# EAGLE board circuitdraft (EAGLE 9.5.2)
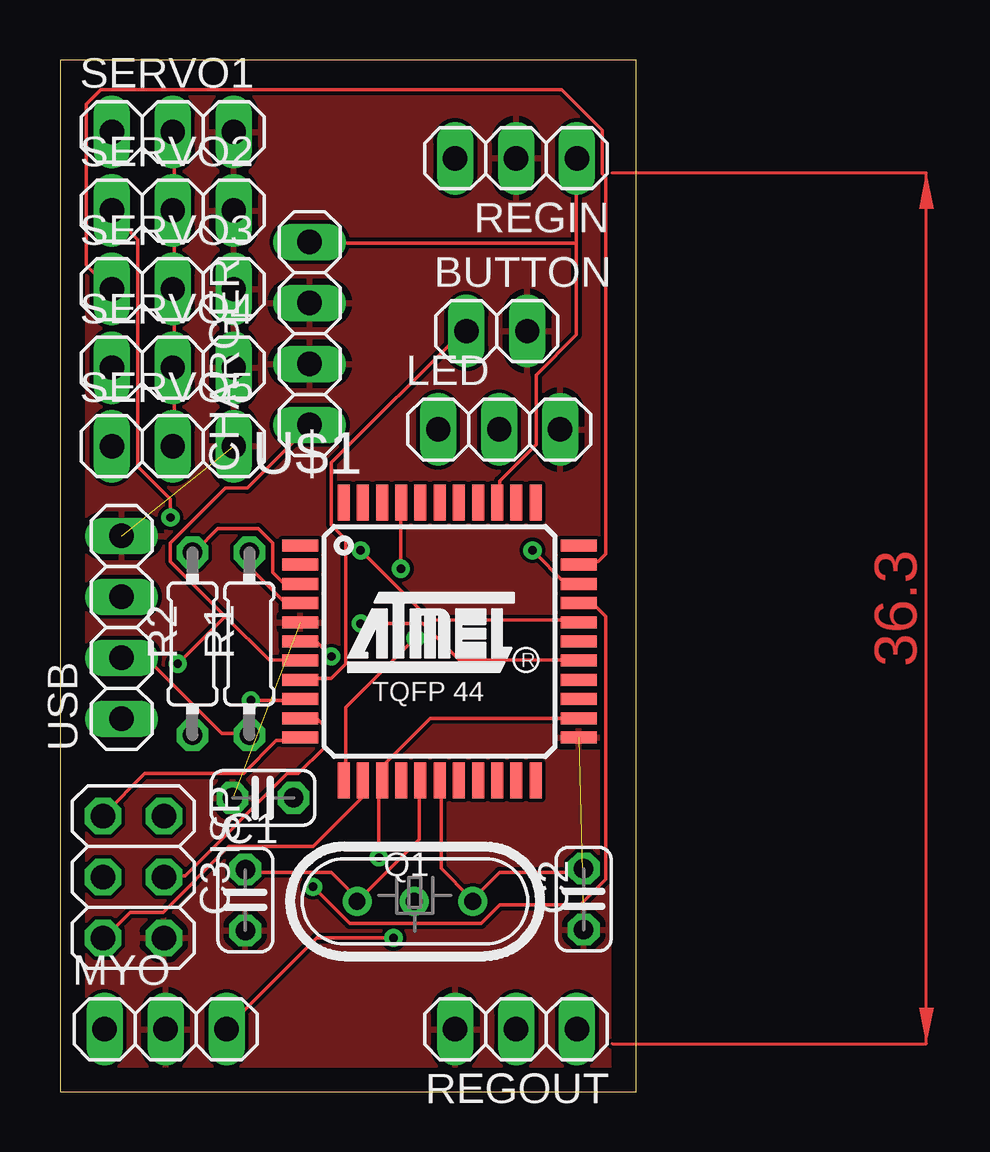
[diagram p0: board, top side]
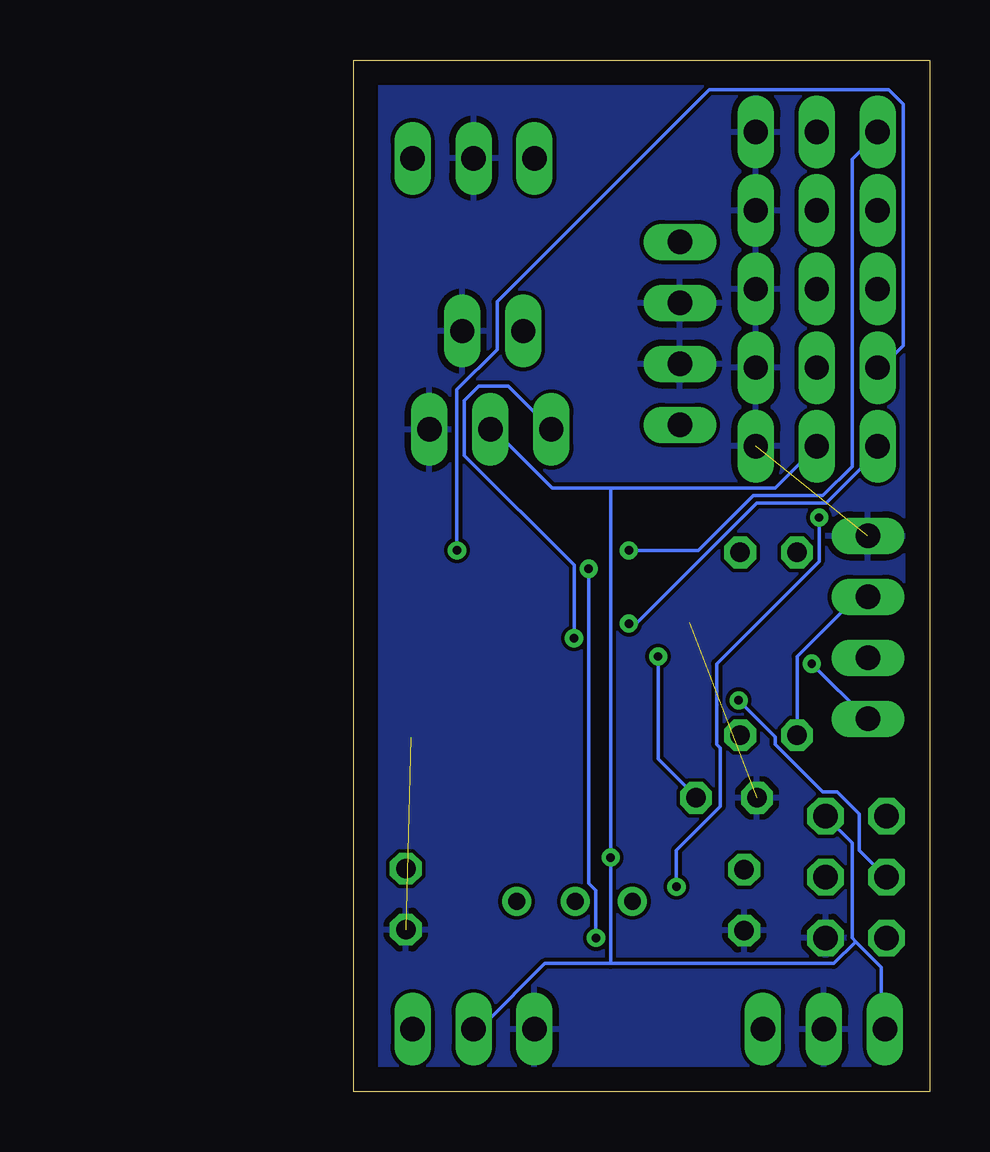
[diagram p1: board, bottom side, seen from below]

Size 24 x 43 mm. Coordinates in mm from the lower left corner, seen from the top.
Outline: 0,0 24,0 24,43 0,43 0,0
Copper layers (1*16): Top 0.035mm / dielectric 1.5mm / Bottom 0.035mm
Design rules "default": minimum track width 6mil, minimum drill 0.35mm, track to track 6mil, track to pad 6mil, pad to pad 6mil, via to via 6mil, smd to smd 6mil, copper to edge 40mil, drill to drill 6mil, minimum pad ring 10mil, minimum via ring 8mil, stop-mask expansion 4mil, vias tented up to drill 0mil, thermal gap 10mil

## Footprints (pad centres in the part's own frame; a part is rotated, then mirrored left to right if it is on the bottom)
1X02 = drill 1.016 long: 1 -1.27,0; 2 1.27,0
C025-024X044 = drill 0.813 octagon: 1 -1.27,0; 2 1.27,0
1X04 = drill 1.016 long: 1 -3.81,0; 2 -1.27,0; 3 1.27,0; 4 3.81,0
2X03 = drill 1.016 octagon: 1 -2.54,-1.27; 2 -2.54,1.27; 3 0,-1.27; 4 0,1.27; 5 2.54,-1.27; 6 2.54,1.27
1X03 = drill 1.016 long: 1 -2.54,0; 2 0,0; 3 2.54,0
HC49U = drill 0.7 pad 1.2: 1 -2.413,0; 2 -0.027,0; 3 2.413,0
0204/7 = drill 0.813 octagon: 1 -3.81,0; 2 3.81,0
TQFP44 = smd 1.5 x 0.5: 1 -5.8,4; 2 -5.8,3.2; 3 -5.8,2.4; 4 -5.8,1.6; 5 -5.8,0.8; 6 -5.8,0; 7 -5.8,-0.8; 8 -5.8,-1.6; 9 -5.8,-2.4; 10 -5.8,-3.2; 11 -5.8,-4; 23 5.8,-4; 24 5.8,-3.2; 25 5.8,-2.4; 26 5.8,-1.6; 27 5.8,-0.8; 28 5.8,0; 29 5.8,0.8; 30 5.8,1.6; 31 5.8,2.4; 32 5.8,3.2; 33 5.8,4 | smd 0.5 x 1.5: 12 -4,-5.8; 13 -3.2,-5.8; 14 -2.4,-5.8; 15 -1.6,-5.8; 16 -0.8,-5.8; 17 0,-5.8; 18 0.8,-5.8; 19 1.6,-5.8; 20 2.4,-5.8; 21 3.2,-5.8; 22 4,-5.8; 34 4,5.8; 35 3.2,5.8; 36 2.4,5.8; 37 1.6,5.8; 38 0.8,5.8; 39 0,5.8; 40 -0.8,5.8; 41 -1.6,5.8; 42 -2.4,5.8; 43 -3.2,5.8; 44 -4,5.8

## Placement (x,y rotation side)
BUTTON  [1X02]  18.2,31.7 0 top
C1  1 uF  [C025-024X044]  8.46,12.24 180 top
C2  22pF  [C025-024X044]  21.82,8.02 90 top
C3  22 pF  [C025-024X044]  7.72,7.98 90 top
CHARGER  [1X04]  10.4,31.6 90 top
ISP  [2X03]  3.06,8.94 270 top
LED  [1X03]  18.3,27.6 0 top
MYO  [1X03]  4.4,2.6 0 top
Q1  16 MHz  [HC49U]  14.79,7.93 0 top
R1  22 Ohms  [0204/7]  7.89,18.66 90 top
R2  22 Ohms  [0204/7]  5.52,18.66 90 top
REGIN  [1X03]  19,38.9 180 top
REGOUT  [1X03]  19,2.6 180 top
SERVO1  [1X03]  4.7,40 0 top
SERVO2  [1X03]  4.7,36.73 0 top
SERVO3  [1X03]  4.7,33.45 0 top
SERVO4  [1X03]  4.7,30.18 0 top
SERVO5  [1X03]  4.7,26.9 0 top
U$1  ATMEGA32U4-AU  [TQFP44]  15.82,18.76 0 top
USB  [1X04]  2.57,19.35 90 top

## Library data of the parts
BUTTON CHARGER ISP LED MYO REGIN REGOUT SERVO1-SERVO5 USB = pinhead
C1-C3 = rcl; SPICEPREFIX: C
Q1 = crystal; OC_FARNELL: unknown; OC_NEWARK: unknown
R1 R2 = rcl; SPICEPREFIX: R
U$1 = mega32U4

## Nets
D+: R1.1 USB.2
D-: R2.1 USB.3
DATAIN: LED.1 U$1.12
GND: BUTTON.2 C1.2 C2.1 C3.1 CHARGER.2 CHARGER.3 ISP.6 LED.3 MYO.2 REGIN.2 REGOUT.3 SERVO1.3 SERVO2.3 SERVO3.3 SERVO4.3 SERVO5.3 U$1.5 U$1.23 USB.4
INT: U$1.25
INTERRUPT: BUTTON.1 U$1.8
MISO: ISP.1 U$1.11
MOSI: ISP.4 U$1.10
N$1: MYO.3 U$1.41
N$2: R2.2 U$1.3
N$3: C1.1 U$1.6
N$4: R1.2 U$1.4
N$5: C3.2 Q1.1 U$1.16
N$6: C2.2 Q1.3 U$1.17
POWER: ISP.2 LED.2 MYO.1 REGOUT.2 SERVO1.2 SERVO2.2 SERVO3.2 SERVO4.2 SERVO5.2 U$1.14 U$1.24
RST: ISP.5 U$1.13
SCK: ISP.3 U$1.9
SCL: U$1.18
SDA: U$1.19
SIGNAL1: SERVO1.1 U$1.29
SIGNAL2: SERVO2.1 U$1.30
SIGNAL3: SERVO3.1 U$1.32
SIGNAL4: SERVO4.1 U$1.31
SIGNAL5: SERVO5.1 U$1.27
STAT: U$1.26
VBAT: CHARGER.4 REGIN.1 U$1.36
VBUS: CHARGER.1 U$1.7 USB.1

## Tracks (layer width: path | path; a pad name or v marks a point on that pad's centre or on a via)
D+
  Top 0.152: R1.1 7.8,14.94 6.73,14.94 3.69,17.98 2.62,17.98 USB.2
D-
  Bottom 0.152: R2.1 5.52,14.94 5.52,18.14 3.08,20.57 2.62,20.57 USB.3
DATAIN  (via drill 0.35)
  Top 0.152: v14.81,18.9 11.92,16 11.92,13.11 U$1.12
  Bottom 0.152: v14.81,18.9 14.81,21.95 19.38,26.52 19.38,28.8 18.77,29.41 17.55,29.41 15.88,27.74 LED.1
GND  (3 unrouted)
  pour Top: -6.8,44.4 26.6,44.4 26.6,-1.6 -6.8,-1.6
  pour Bottom: -7.7,44.2 26.6,44.2 26.6,-1.6 -7.7,-1.6
INTERRUPT
  Top 0.152: U$1.8 10.09,17.22 11.31,17.22 11.92,17.83 11.92,23.01 11.31,23.62 11.31,26.21 16.79,31.7 BUTTON.1
MISO
  Top 0.152: U$1.11 9.94,14.63 9.02,14.63 7.65,13.26 3.53,13.26 1.86,11.58 ISP.1
MOSI
  Top 0.152: U$1.10 10.09,15.54 10.7,15.54 11,15.24 11,14.33 9.94,13.26 9.48,13.26 5.21,8.99 4.45,8.99 ISP.4
N$1  (via drill 0.35)
  Top 0.152: v14.2,21.79 14.2,24.54 U$1.41 | v13.9,6.4 10.7,6.4 7.04,2.74 MYO.3
  Bottom 0.152: v14.2,21.79 14.2,8.69 13.9,8.38 v13.9,6.4
N$2
  Top 0.152: U$1.3 9.94,21.18 9.33,21.18 8.87,21.64 8.87,22.86 8.26,23.47 6.58,23.47 5.67,22.55 R2.2
N$3  (via drill 0.35)
  Top 0.152: v11.31,18.14 10.7,18.75 10.09,18.75 U$1.6
  Bottom 0.152: v11.31,18.14 11.31,13.87 9.78,12.34 C1.1
N$4
  Top 0.152: U$1.4 9.94,20.42 9.33,20.42 7.95,21.79 7.95,22.4 R1.2
N$5
  Top 0.152: U$1.16 14.96,12.95 14.96,10.52 12.53,8.08 Q1.1 12.37,8.08 11.31,9.14 7.8,9.14 C3.2
N$6
  Top 0.152: U$1.17 15.88,12.95 15.88,9.3 17.1,8.08 Q1.3 17.25,8.08 18.32,9.14 21.67,9.14 C2.2
POWER  (via drill 0.35)
  Top 0.152: SERVO1.2 4.75,39.93 4.75,36.73 SERVO2.2 4.75,36.58 4.75,33.53 SERVO3.2 4.75,33.38 4.75,30.18 SERVO4.2 4.75,30.02 4.75,26.98 SERVO5.2 | U$1.24 21.52,15.54 15.42,15.54 13.44,13.56 13.44,13.11 U$1.14 13.29,12.95 v13.29,9.75
  Bottom 0.152: 13.29,25.15 6.43,25.15 4.75,26.82 SERVO5.2 | 13.29,25.15 15.73,25.15 18.16,27.58 LED.2 | 3.08,6.25 3.23,6.4 3.23,10.36 4.3,11.43 ISP.2 | 3.08,6.25 2.01,5.18 2.01,2.74 MYO.1 | 13.29,5.33 3.99,5.33 3.08,6.25 | 13.29,5.33 16.03,5.33 18.62,2.74 18.93,2.74 REGOUT.2 | 13.29,5.33 v13.29,9.75 13.29,25.15
RST
  Top 0.152: U$1.13 12.53,12.95 12.53,12.19 10.54,10.21 7.04,10.21 4.3,7.47 2.92,7.47 1.86,6.4 ISP.5
SCK  (via drill 0.35)
  Top 0.152: v7.95,16.31 9.94,16.31 U$1.9
  Bottom 0.152: v7.95,16.31 6.43,14.78 6.43,14.48 4.45,12.5 3.84,12.5 2.92,11.58 2.92,10.06 1.86,8.99 ISP.3
SIGNAL1  (via drill 0.35)
  Top 0.152: v12.53,22.55 15.42,19.66 21.52,19.66 U$1.29
  Bottom 0.152: v12.53,22.55 9.63,22.55 7.34,24.84 4.45,24.84 3.23,26.06 3.23,38.86 2.16,39.93 SERVO1.1
SIGNAL2  (via drill 0.35)
  Top 0.152: v10.54,8.53 12.07,7.01 17.55,7.01 18.32,7.77 21.67,7.77 22.74,8.84 22.74,19.81 22.28,20.27 21.67,20.27 U$1.30 | v4.6,23.93 4.6,24.69 3.23,26.06 3.23,35.51 2.16,36.58 SERVO2.1
  Bottom 0.152: v10.54,8.53 10.54,10.06 8.72,11.89 8.72,14.33 8.87,14.48 8.87,17.83 4.6,22.1 v4.6,23.93
SIGNAL3
  Top 0.152: U$1.32 21.67,22.1 22.43,22.1 22.74,22.4 22.74,38.1 22.58,38.25 22.58,40.08 20.91,41.76 1.71,41.76 1.1,41.15 1.1,34.44 2.01,33.53 SERVO3.1
SIGNAL4  (via drill 0.35)
  Top 0.152: v19.69,22.55 21.06,21.18 21.52,21.18 U$1.31
  Bottom 0.152: v19.69,22.55 19.69,29.26 18.01,30.94 18.01,32.92 9.17,41.76 1.71,41.76 1.1,41.15 1.1,31.09 2.01,30.18 SERVO4.1
SIGNAL5  (via drill 0.35)
  Top 0.152: v12.53,19.51 15.12,19.51 16.64,17.98 21.52,17.98 U$1.27
  Bottom 0.152: v12.53,19.51 12.22,19.51 7.19,24.54 4.3,24.54 2.01,26.82 SERVO5.1
VBAT
  Top 0.152: 21.52,35.36 21.52,38.86 REGIN.1 | 21.52,35.36 21.52,31.55 19.84,29.87 19.84,26.98 18.32,25.45 18.32,24.69 U$1.36 | 21.52,35.36 10.54,35.36 CHARGER.4
VBUS  (via drill 0.35)
  Top 0.152: 6.89,19.81 4.6,22.1 4.6,22.86 6.89,25.15 7.8,25.15 10.39,27.74 CHARGER.1 | 6.89,19.81 8.72,17.98 9.94,17.98 U$1.7 | 6.89,19.81 v4.91,17.83
  Bottom 0.152: v4.91,17.83 2.62,15.54 USB.1
(copper drawn outside any net)
  shapes: Top area x1